# EAGLE board SradPcb (EAGLE 9.6.2)
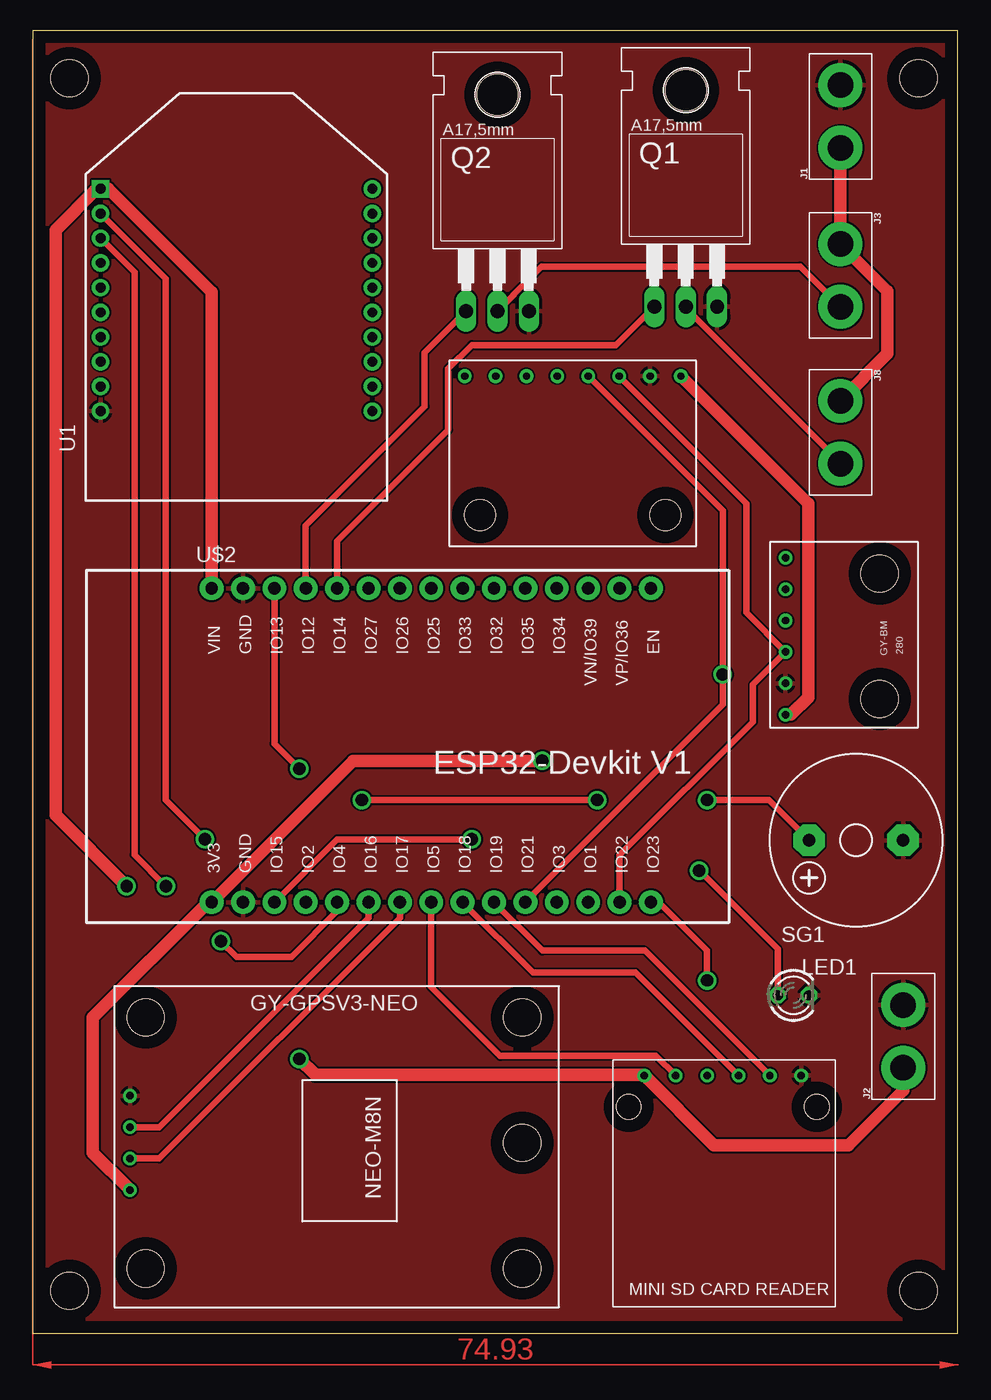
[diagram p0: board, top side]
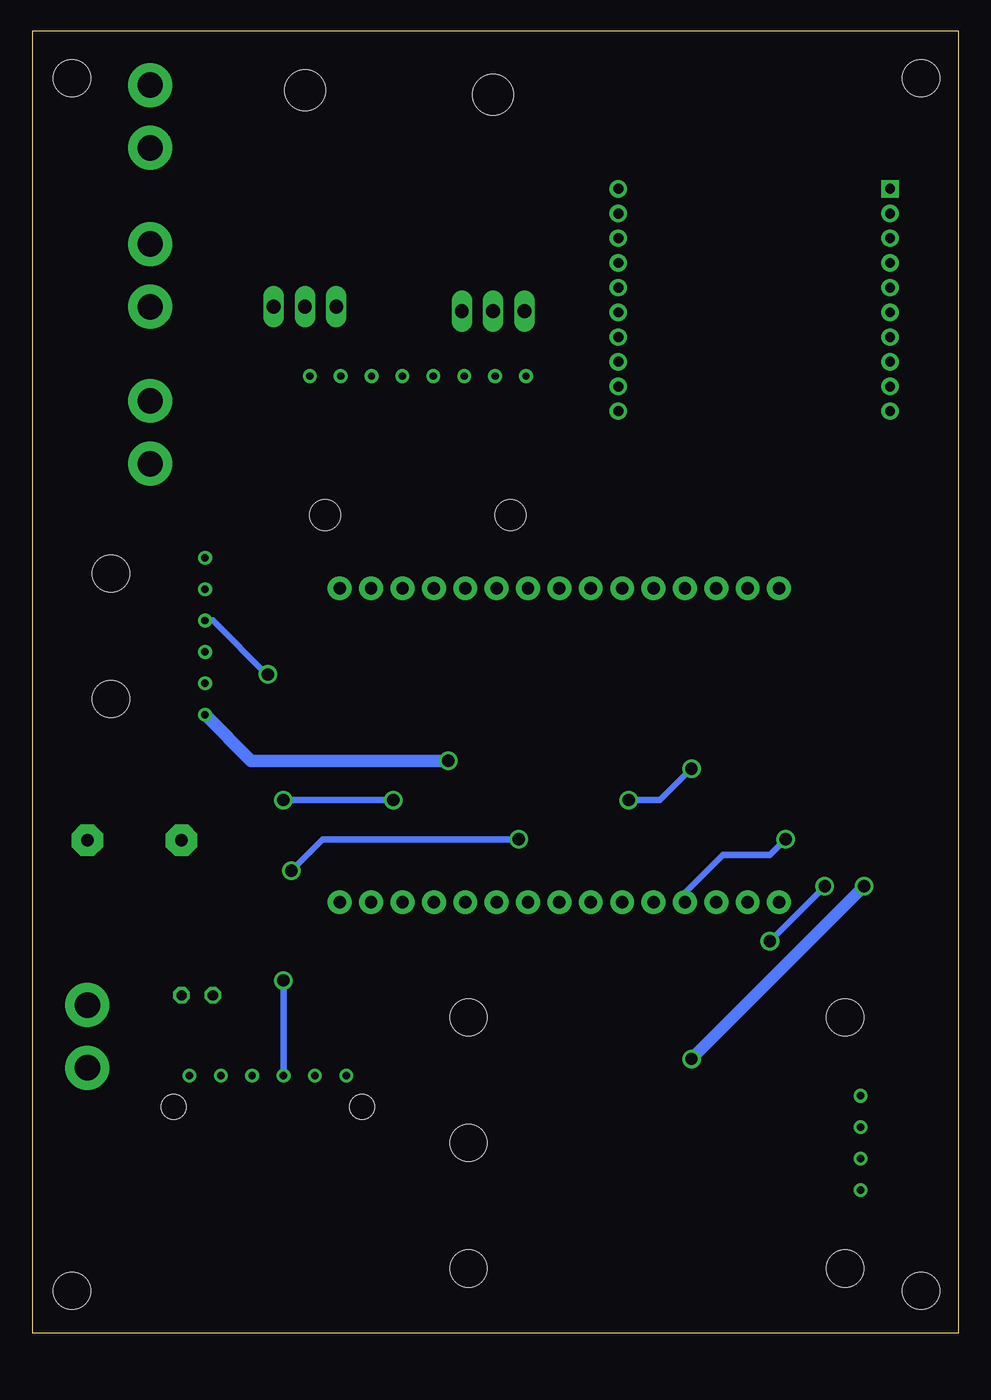
[diagram p1: board, bottom side, seen from below]

Size 74.91 x 105.43 mm. Coordinates in mm from the lower left corner, seen from the top.
Outline: 0,0 74.91,0 74.91,105.43 0,105.43 0,0
Copper layers (1*16): Top 0.035mm / dielectric 1.5mm / Bottom 0.035mm
Design rules "default": minimum track width 6mil, minimum drill 0.35mm, track to track 6mil, track to pad 6mil, pad to pad 6mil, via to via 6mil, smd to smd 6mil, copper to edge 40mil, drill to drill 6mil, minimum pad ring 10mil, minimum via ring 8mil, stop-mask expansion 4mil, vias tented up to drill 0mil, thermal gap 10mil
Holes 3 mm at 3,3.46 71.73,3.46 3,101.6 71.73,101.6

## Footprints (pad centres in the part's own frame; a part is rotated, then mirrored left to right if it is on the bottom)
1X02_XTRA_BIG = drill 2.057 pad 3.556: 1 -2.54,0; 2 2.54,0
LED3MM = drill 0.813 octagon: A -1.27,0; K 1.27,0
TO220 = drill 1.118 long: 1 -2.54,-6.35; 2 0,-6.35; 3 2.54,-6.35 | hole 3.302: 0,11.176
F/CM12P = drill 1.016 pad 2.54 octagon: + 3.81,0; - -3.81,0
DIP2200W51P200L3294H279Q20P = drill 0.8 pad 1.4 square: 1 -11,8.75 | drill 0.8 pad 1.4: 2 -11,6.75; 3 -11,4.75; 4 -11,2.75; 5 -11,0.75; 6 -11,-1.25; 7 -11,-3.25; 8 -11,-5.25; 9 -11,-7.25; 10 -11,-9.25; 11 11,-9.25; 12 11,-7.25; 13 11,-5.25; 14 11,-3.25; 15 11,-1.25; 16 11,0.75; 17 11,2.75; 18 11,4.75; 19 11,6.75; 20 11,8.75
MPU6050 = drill 0.6: ADO 1.25,3.75; GND 1.25,16.25; INT 1.25,1.25; SCL 1.25,13.75; SDA 1.25,11.25; VCC 1.25,18.75; XCL 1.25,6.25; XDA 1.25,8.75 | hole 2.5: 12.5,17.5; 12.5,2.5
ESP32-DEVKITV1 = drill 1 pad 1.93: 3V3 -16.52,-12.27; D1 13.96,-12.27; D2 -8.9,-12.27; D3 11.42,-12.27; D4 -6.36,-12.27; D5 1.26,-12.27; D12 -8.9,13.135; D13 -11.44,13.135; D14 -6.36,13.135; D15 -11.44,-12.27; D16 -3.82,-12.27; D17 -1.28,-12.27; D18 3.8,-12.27; D19 6.34,-12.27; D21 8.88,-12.27; D22 16.5,-12.27; D23 19.04,-12.27; D25 1.26,13.135; D26 -1.28,13.135; D27 -3.82,13.135; D32 6.34,13.135; D33 3.8,13.135; D34 11.42,13.135; D35 8.88,13.135; D36 16.5,13.135; D39 13.96,13.135; EN 19.04,13.135; GND@1 -13.98,13.135; GND@2 -13.98,-12.27; VIN -16.52,13.135
NEOGPSM8N = drill 0.6: GND 8.89,1.27; RX 13.97,1.27; TX 11.43,1.27; VCC 16.51,1.27 | hole 3: 2.54,2.54; 22.86,2.54; 12.7,33.02; 22.86,33.02; 2.54,33.02
BMP280 = drill 0.6: CSB 3.81,1.27; GND 11.43,1.27; SCL 8.89,1.27; SDA 6.35,1.27; SDO 1.27,1.27; VCC 13.97,1.27 | hole 3: 2.54,8.89; 12.7,8.89
MNISD = drill 0.6: 3V3 1.27,2.54; CS 1.27,5.08; GND 1.27,15.24; MISO 1.27,12.7; MOSI 1.27,7.62; SCK 1.27,10.16 | hole 2: 3.81,1.27; 3.81,16.51

## Placement (x,y rotation side)
J1  [1X02_XTRA_BIG]  65.41,98.5 90 top
J2  [1X02_XTRA_BIG]  70.48,24.05 90 top
J3  [1X02_XTRA_BIG]  65.41,85.64 270 top
J8  [1X02_XTRA_BIG]  65.41,72.94 270 top
LED1  [LED3MM]  61.59,27.39 0 top
Q1  TIP122  [TO220]  52.88,89.45 0 top
Q2  TIP122  [TO220]  37.64,89.09 0 top
SG1  F/CM12P  [F/CM12P]  66.67,39.92 180 top
U1  XBP9B-DPST-001  [DIP2200W51P200L3294H279Q20P]  16.51,83.9 0 top
U$1  MPU6050MPU6050  [MPU6050]  33.73,78.74 270 top
U$2  ESP32DEVKITV1  [ESP32-DEVKITV1]  31.02,47.18 0 top
U$3  NEOGPSM8NNEOGPSM8N  [NEOGPSM8N]  6.62,28.13 270 top
U$4  BMP280BMP280  [BMP280]  59.69,64.06 270 top
U$5  MINISD  [MNISD]  46.99,22.14 270 top

## Library data of the parts
J1-J3 J8 = SparkFun-Connectors
LED1 = led
Q1 Q2 = transistor-npn
SG1 = buzzer; OC_FARNELL: unknown; OC_NEWARK: unknown
U1 = XBP9B-DPST-001; AVAILABILITY: In Stock; DESCRIPTION: General ISM < 1GHz - Transceiver Module 900MHz Antenna Not Included, RP-SMA Through Hole; MF: Digi International; MP: XBP9B-DPST-001; PACKAGE: Module Digi International; PRICE: None; PURCHASE-URL: https://pricing.snapeda.com/search/part/XBP9B-DPST-001/?ref=eda
U$1 = MPU6050
U$2 = ESP32-DEVKITV1
U$3 = NEOGPSM8N
U$4 = BMP280
U$5 = minisd

## Nets
3V: U$1.VCC U$2.3V3 U$3.VCC U$4.VCC
BUZZER: SG1.+ U$2.D13
CLK: U$2.D18 U$5.SCK
CS: U$2.D5 U$5.CS
DROGUE: Q2.1 U$2.D12
GND: J1.2 J2.2 LED1.K Q1.3 Q2.3 SG1.- U1.10 U$1.GND U$2.GND@1 U$2.GND@2 U$3.GND U$4.GND U$5.GND
GPS_RX: U$2.D17 U$3.RX
GPS_TX: U$2.D16 U$3.TX
LED: LED1.A U$2.D15
MAIN: Q1.1 U$2.D14
MISO: U$2.D19 U$5.MISO
MOSI: U$2.D23 U$5.MOSI
NICHROME: J1.1 J3.1 J8.1
SCL: U$1.SCL U$2.D22 U$4.SCL
SDA: U$1.SDA U$2.D21 U$4.SDA
TERMINAL1: J3.2 Q2.2
TERMINAL2: J8.2 Q1.2
VIN: J2.1 U1.1 U$2.VIN U$5.3V3
XBEE_RX: U1.3 U$2.D4
XBEE_TX: U1.2 U$2.D2

## Tracks (layer width: path | path; a pad name or v marks a point on that pad's centre or on a via)
3V  (via drill 1)
  Top 1.016: U$3.VCC 4.87,14.64 4.87,25.57 14.2,34.91 U$2.3V3 25.95,46.35 v41.27,46.35 | U$4.VCC 61.41,50.09 62.81,51.49 62.81,67.17 U$1.VCC
  Bottom 1.016: U$4.VCC 57.23,46.35 v41.27,46.35
BUZZER  (via drill 1)
  Top 0.508: U$2.D13 19.58,47.73 v21.59,45.72 | v26.67,43.18 v45.72,43.18 | v54.61,43.18 59.61,43.18 SG1.+
  Bottom 0.508: v21.59,45.72 24.13,43.18 v26.67,43.18 | v45.72,43.18 v54.61,43.18
CLK
  Top 0.508: U$2.D18 40.52,29.21 48.81,29.21 U$5.SCK
CS
  Top 0.508: U$2.D5 32.28,28.05 37.85,22.47 50.48,22.47 U$5.CS
DROGUE
  Top 0.508: U$2.D12 22.12,65.39 31.75,75.03 31.75,79.39 Q2.1
GND
  pour Top: 0,104.76 74.93,104.76 74.93,0 0,0
GPS_RX
  Top 0.508: U$2.D17 29.74,33.64 10.26,14.16 U$3.RX
GPS_TX
  Top 0.508: U$2.D16 27.2,33.64 10.26,16.7 U$3.TX
LED  (via drill 1)
  Top 0.508: U$2.D15 24.68,40.01 v35.56,40.01 | v53.98,37.47 60.33,31.11 LED1.A
  Bottom 0.508: v35.56,40.01 51.44,40.01 v53.98,37.47
MAIN
  Top 0.508: U$2.D14 24.66,64.12 33.66,73.12 33.66,78.11 35.56,80.01 47.24,80.01 Q1.1
MISO
  Top 0.508: U$2.D19 41.27,31 49.57,31 U$5.MISO
MOSI  (via drill 1)
  Top 0.508: U$2.D23 50.7,34.91 54.61,31 v54.61,28.57
  Bottom 0.508: v54.61,28.57 U$5.MOSI
NICHROME
  Top 1.016: J1.1 J3.1 69.22,84.38 69.22,79.3 J8.1
SCL
  Top 0.508: U$1.SCL 57.78,67.19 57.78,58.34 U$4.SCL 58.31,52.52 58.31,49.52 47.52,38.72 U$2.D22
SDA  (via drill 1)
  Top 0.508: U$2.D21 39.9,34.95 55.88,50.92 v55.88,53.34 55.88,66.59 U$1.SDA
  Bottom 0.508: v55.88,53.34 55.92,53.3 60.33,57.7 U$4.SDA
TERMINAL1
  Top 0.508: Q2.2 38.94,84.03 38.94,84.09 41.2,86.36 62.15,86.36 J3.2
TERMINAL2
  Top 0.508: Q1.2 52.88,83.01 65.41,70.48 J8.2
VIN  (via drill 1)
  Top 1.016: v21.59,22.23 22.9,20.91 49.49,20.91 U$5.3V3 55.16,15.24 66.04,15.24 70.48,19.68 J2.1 | U$2.VIN 14.5,84.3 6.14,92.65 U1.1 5.2,92.65 1.86,89.31 1.86,41.95 v7.62,36.2
  Bottom 1.016: v21.59,22.23 v7.62,36.2
XBEE_RX  (via drill 1)
  Top 0.508: U1.3 8.26,85.91 8.26,38.73 v10.79,36.2 | v15.24,31.75 16.51,30.48 20.95,30.48 24.66,34.19 U$2.D4
  Bottom 0.508: v10.79,36.2 v15.24,31.75
XBEE_TX  (via drill 1)
  Top 0.508: U1.2 10.79,85.36 10.79,43.18 v13.97,40.01
  Bottom 0.508: v13.97,40.01 15.24,38.73 19.05,38.73 22.12,35.66 U$2.D2
(copper drawn outside any net)
  shapes: Top area x2